# Altium PCB PCB_LiBoBattery.PcbDoc
Units mil, origin at the board's own origin, x right, y up, seen from the top; angles counter-clockwise.
Board outline 1960.63 x 1724.41 mil, 2 copper layers (Top Layer, Bottom Layer); 18 components, 10 nets, 52 pads, 11 vias.
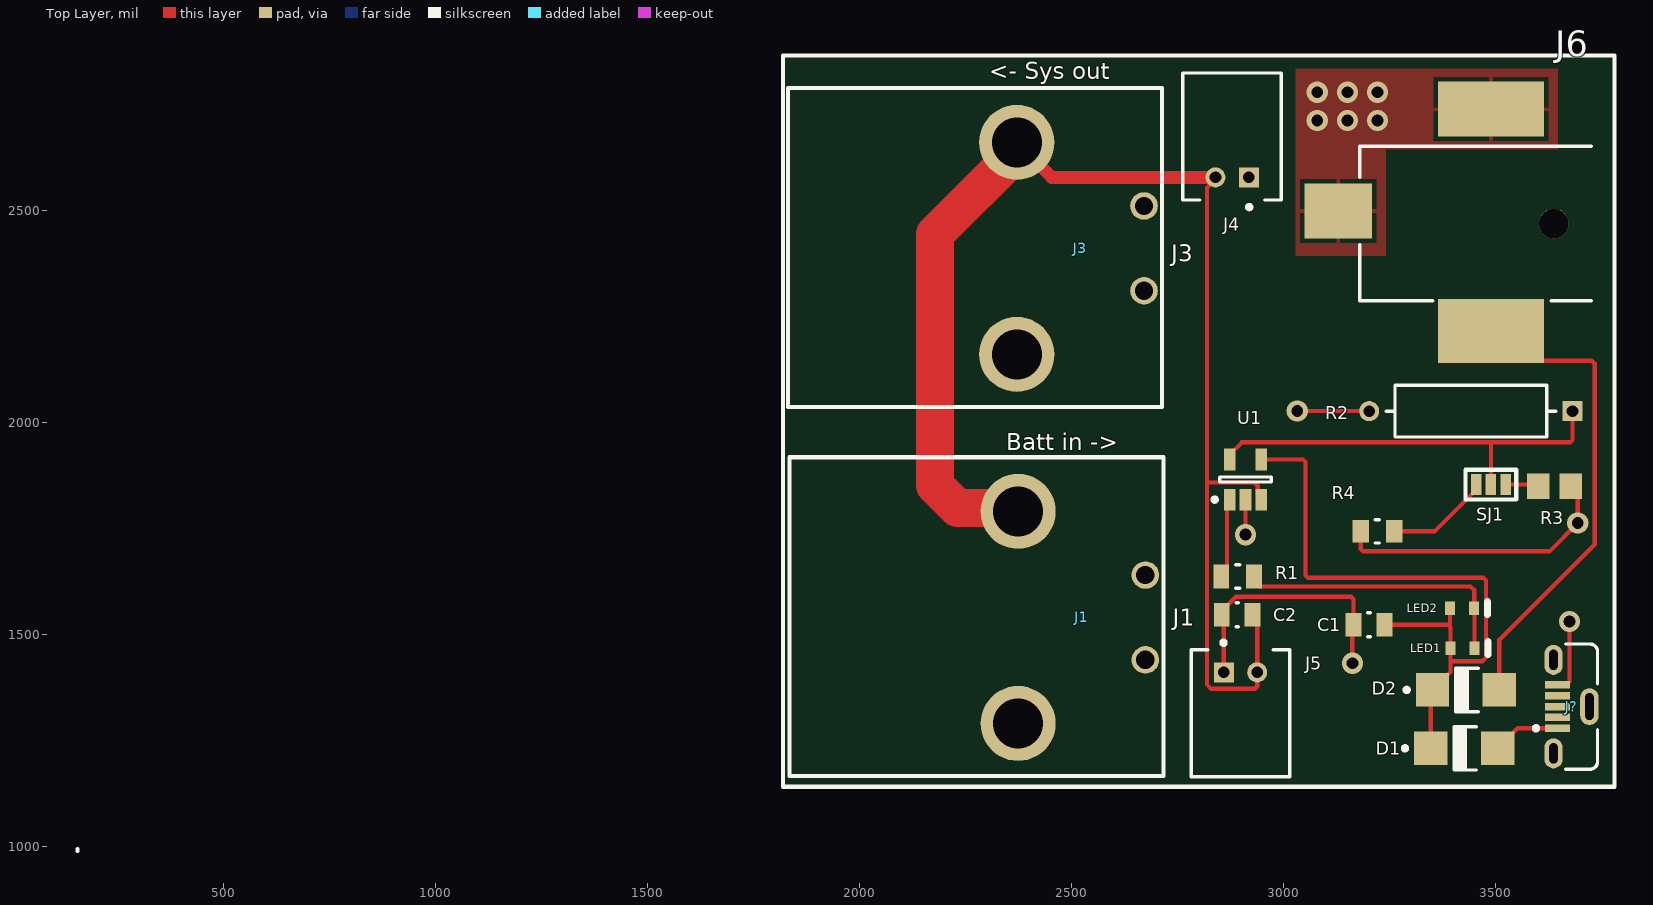
[diagram p0: Top Layer view]
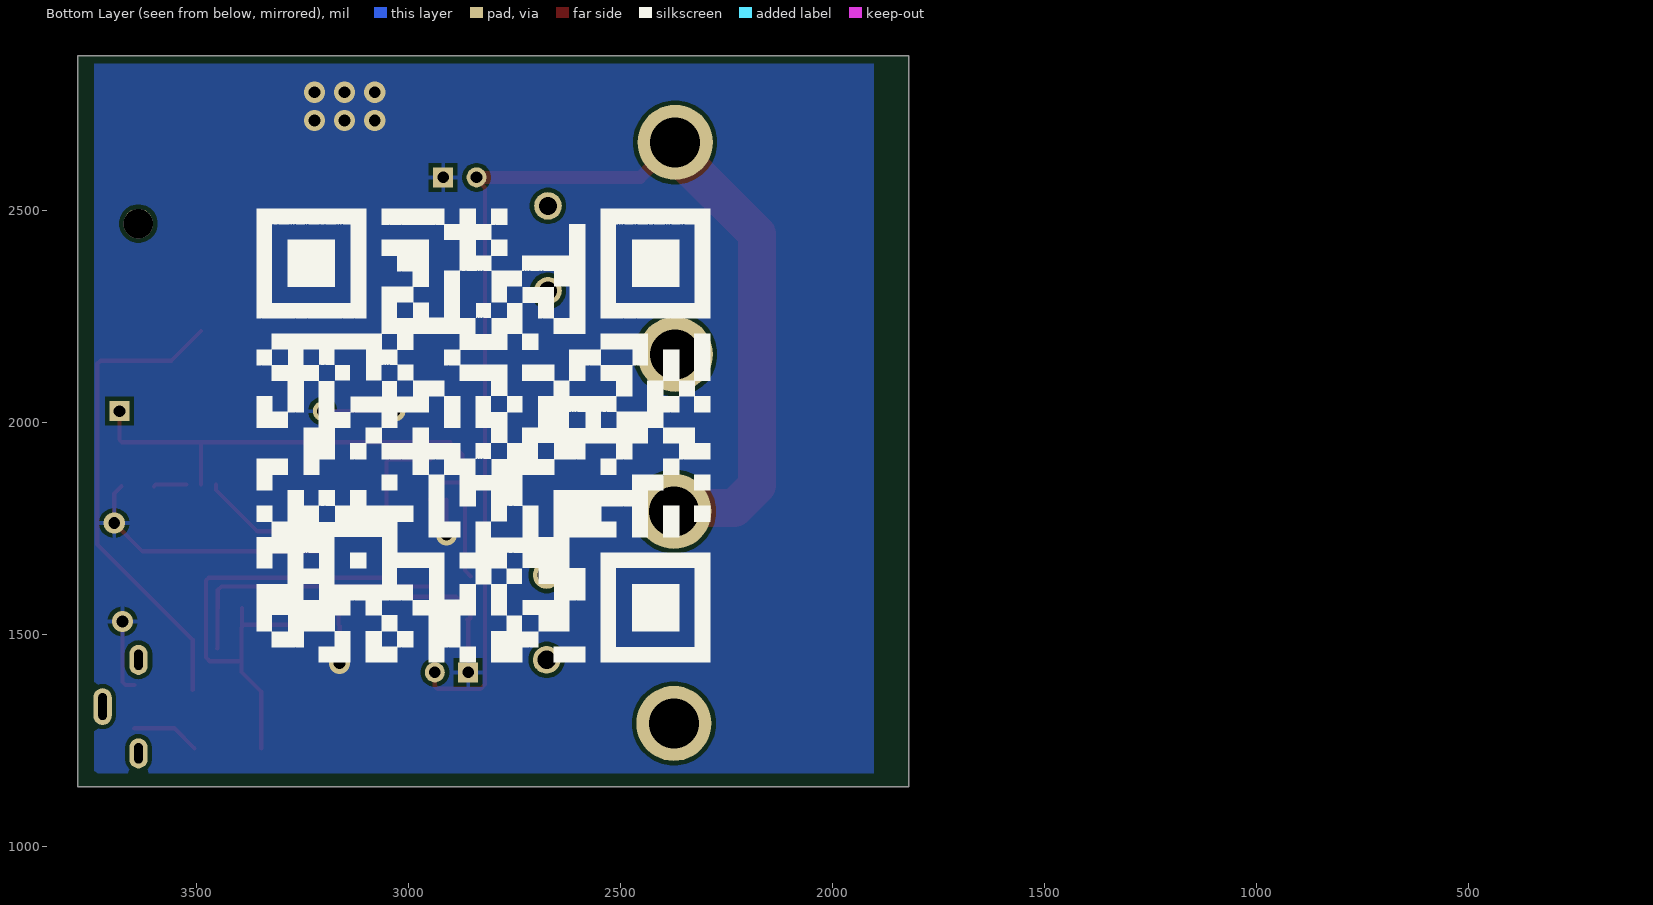
[diagram p1: Bottom Layer view, seen from below]
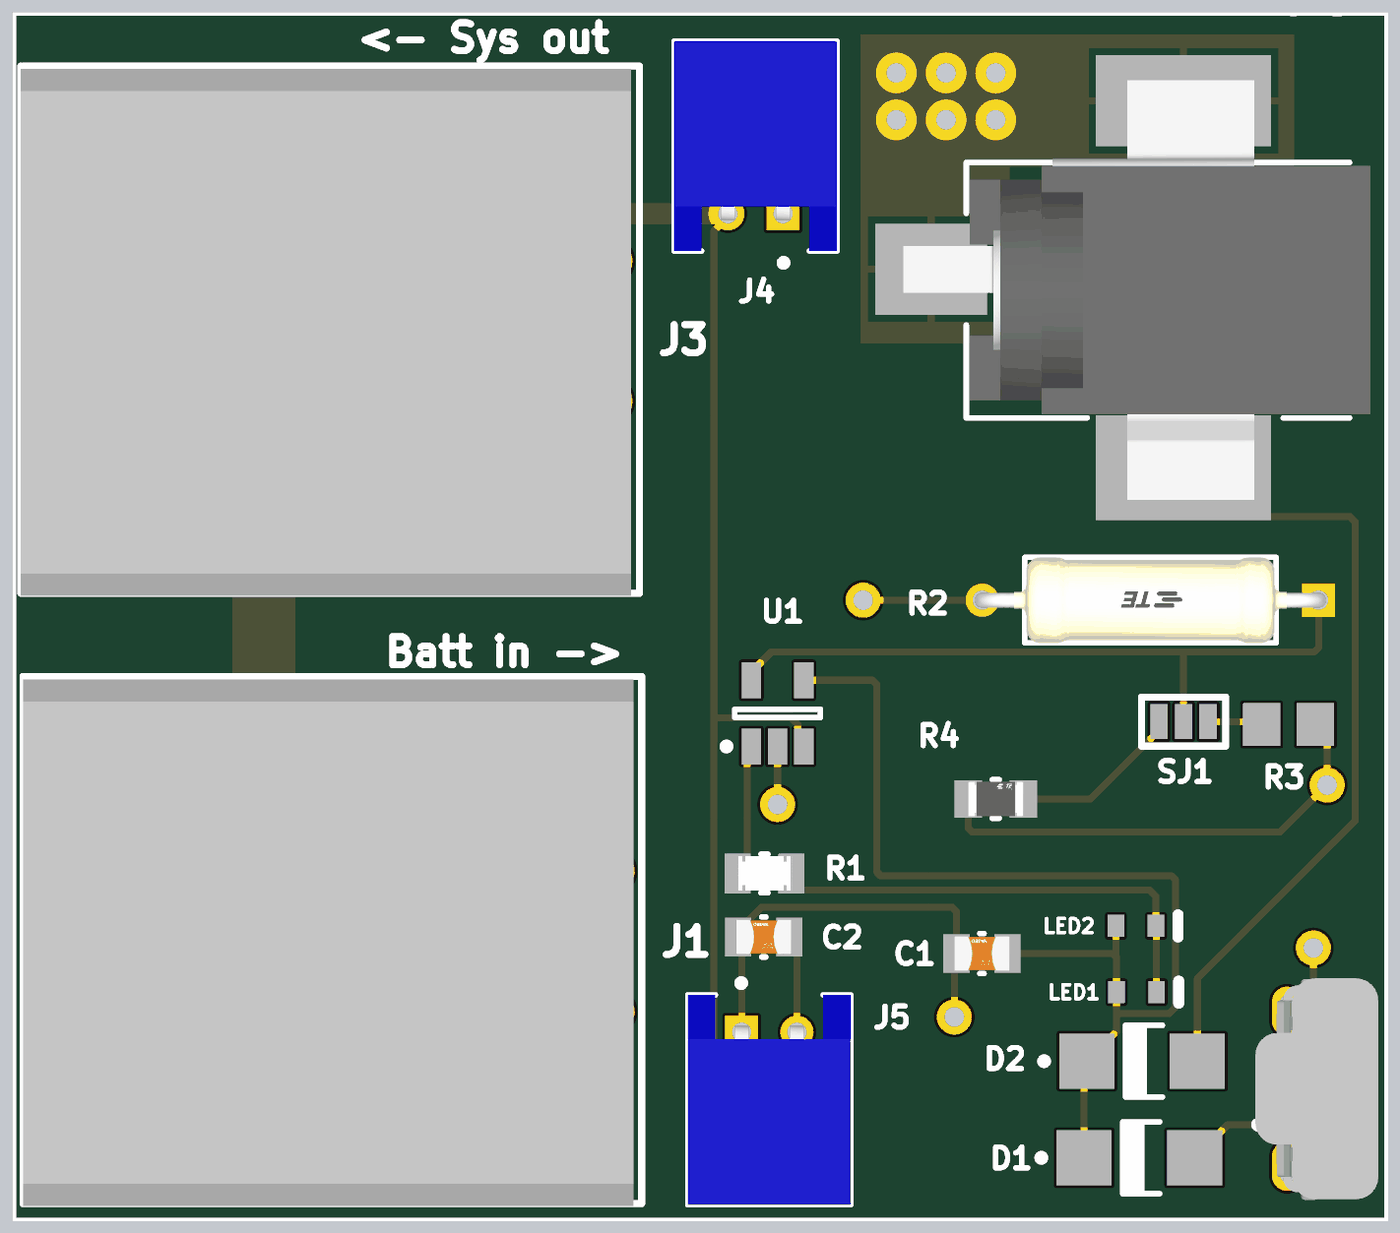
[diagram p2: 3D render of the assembled board from above, using the file's embedded part models]

## Layer stack, top to bottom
Top Solder: solder mask 0.4, Solder Resist, Dk 3.5
Top Layer: signal copper 1.4
Dielectric 1: dielectric 12.6, FR-4, Dk 4.8
Bottom Layer: signal copper 1.4
Bottom Solder: solder mask 0.4, Solder Resist, Dk 3.5

## Board outline
1818.9,1141.73 1818.9,2866.14 3779.53,2866.14 3779.53,1141.73

## Design rules (kind name [scope] priority, off if disabled: settings)
Clearance [All] p1: gap=10 ignorepadtopadclearanceinfootprint=FALSE
PolygonConnect [All] p1: connectstyle=Relief reliefconductorwidth=10 reliefentries=4 polygonreliefangle="90 Angle" airgapwidth=10
RoutingVias [All] p1: holewidth=28 width=50 viastyle="Through Hole" minholewidth=28 minwidth=50 maxholewidth=28 maxwidth=50
SolderMaskExpansion [All] p1: expansion=4 istentingtop=FALSE
SupplyNets "Schematic Supply Nets" [InNet('GND')] p1: voltage=0.000
Width [All] p1: maxlimit=10 minlimit=10 preferedwidth=10
30 further rules are at their usual default settings.

## Components (designator, comment, footprint, x,y, rotation, side; value= is the part's Value field where it differs from the comment)
C1 "4.7UF" FP-CC0805-0_85-MFG 3200.79,1523.62 r180 top value="4.7 uF"
C2 "4.7UF" FP-CC0805-0_85-MFG 2889.76,1547.24 r180 top value="4.7 uF"
D1 "40V, 1A" ONSC-SMA-2-403D-02_V 3425.2,1232.28 r0 top
D2 "40V, 1A" ONSC-SMA-2-403D-02_V 3429.13,1370.08 r0 top
J1 "1-79276-2" PCBComponent_1 2373.23,1790.94 r270 top
J3 "1-79276-2" PCBComponent_1 2370.08,2661.42 r270 top
J4 "S2B-PH-K-S(LF)(SN)" JST-S2B-PH-K-S_V 2877.95,2675.2 r180 top
J5 "S2B-PH-K-S(LF)(SN)" JST-S2B-PH-K-S_V 2897.64,1314.96 r0 top
J6 "CONN PWR JACK 2.1X5.5MM SOLDER" FP-RASM722PTR13X-MFG 3468.9,2469.68 r90 top
J? "105133-0001" MOLX-105133-0001_V 3678.15,1330.71 r90 top
LED1 "RED" VISH-TLMS1000_V 3421.26,1468.5 r0 top
LED2 "RED" VISH-TLMS1000_V 3420.28,1562.99 r0 top
R1 "330" FP-CRCW0805-e3-MFG 2890.75,1637.8 r180 top
R2 "PROG" FP-CFR50J2K2-MFG 3440.94,2027.56 r180 top
R3 "2k" RESC2013X70X40ML20T20 3637.8,1850.39 r180 top
R4 "10k" FP-RN732A-MFG 3220.47,1744.09 r0 top value=10KΩ
SJ1 "SJumper3POS" SJumper3POS-Footprint-1 3488.19,1854.33 r180 top
U1 "Change management controler" SOT-23-OT5_M 2909.45,1866.14 r90 top

## Footprints (in the part's own frame and the unit in brackets; to place one, negate y for a bottom-side part, rotate by r counter-clockwise, add the part's x,y. Pads: shape width x height; smd on the part's side, far side on the other; paste and mask are expansions set on the pad)
FP-CC0805-0_85-MFG [mm]
  rect 0.95x1.4 smd paste+0 mask+0: 1(-0.925,0) 2(0.925,0)
  silkscreen extent -0.08,-0.72 0.08,0.72, body extent -1.6,-1.05 1.6,1.05, height 0.25
FP-CFR50J2K2-MFG [mm]
  rect 1.2x1.2 hole 0.7 paste-2539.97 mask+0: 1(-6.09,0)
  round 1.2 hole 0.7 paste-2539.97 mask+0: 2(6.09,0)
  silkscreen extent -5.09,-1.55 5.09,1.55, body extent -6.79,-1.65 6.79,1.65, height 0.25
FP-CRCW0805-e3-MFG [mm]
  rect 0.95x1.45 smd paste+0 mask+0: 1(-0.975,0) 2(0.975,0)
  silkscreen extent -0.13,-0.7 0.13,0.7, body extent -1.55,-0.82 1.55,0.82, height 0.25
FP-RASM722PTR13X-MFG [mm]
  rect 3.3x4.06 smd paste+0 mask+0: 1(0.76,8.65)
  rect 3.81x6.35 smd paste+0 mask+0: 2(-6.43,-0.49)
  rect 3.3x6.35 smd paste+0 mask+0: 3(6.86,-0.49)
  round 1.78 hole 1.78 unplated paste-2539.97 mask+0: ""(0,-4.25)
  silkscreen extent -4.63,-6.5 4.63,7.38, body extent -8.43,-7.48 8.61,10.78, height 0.25
FP-RN732A-MFG [mm]
  rect 1x1.35 smd paste+0 mask+0: 1(-1,0) 2(1,0)
  silkscreen extent -0.13,-0.7 0.13,0.7, body extent -1.6,-0.8 1.6,0.8, height 0.25
JST-S2B-PH-K-S_V [mm] "THD, 2-Leads, Body 7.6x5.9mm, Pitch 2mm"
  rect 1.2x1.2 hole 0.7: 1(-1,2.45)
  round 1.2 hole 0.7: 2(1,2.45)
  silkscreen extent -2.95,-3.8 2.95,4.35, body extent -2.95,-3.8 2.95,3.8, height 4.8
MOLX-105133-0001_V [mm] "Micro USB B, 5-Leads, Pitch 0.65mm"
  rect 0.45x1.5 smd: 1(-1.3,0.825) 2(-0.65,0.825) 3(0,0.825) 4(0.65,0.825) 5(1.3,0.825)
  oval 1.8x1.1 hole 0.5 slot 1.2 at 0 deg: 6(-2.8,1.075) 7(2.8,1.075)
  oval 2.2x1.1 hole 0.5 slot 1.6 at 0 deg: 8(0,-1.075)
  silkscreen extent -3.75,-1.56 3.75,2.25, body extent -4.02,-2.22 4,2.23, height 7.51
ONSC-SMA-2-403D-02_V [mm] "Molded, 2-Leads, Body 4.57x2.92mm"
  rect 2x2 smd: 1(-2,0) 2(2,0)
  silkscreen extent -3.67,-1.3 0.74,1.3, body extent -2.16,-1.3 2.16,1.3, height 2.2
PCBComponent_1 [mm]
  round 4.5 hole 3: 1(0,0) 2(12.7,0)
  round 1.65 hole 1.1: ""(3.81,7.62) ""(8.89,7.62)
  silkscreen extent -3.25,-13.7 15.85,8.7, body extent -3.14,-13.7 15.94,8.4, height 10.86
RESC2013X70X40ML20T20 [mm] "Chip Resistor, 2-Leads, Body 2.00x1.25mm, IPC Low Density"
  rect 1.35x1.55 smd: 1(-0.975,0) 2(0.975,0)
  body extent -1.1,-0.72 1.1,0.72, height 0.7
SJumper3POS-Footprint-1 [mil]
  rect 25x50 smd: 1(-35,0) 2(0,0) 3(35,0)
  silkscreen extent -60,-35 60,35
SOT-23-OT5_M [mm] "SOT23, 5-Leads, Body 2.9x1.7mm, Pitch 0.95mm, Lead Span 2.8mm, IPC Low Density"
  rect 1.3x0.7 smd: 1(-1.2,0.95) 2(-1.2,0) 3(-1.2,-0.95) 4(1.2,-0.95) 5(1.2,0.95)
  silkscreen extent -1.32,-1.55 0.15,1.97, body extent -0.9,-1.55 0.9,1.55, height 1.45
VISH-TLMS1000_V [mm] "SMD, 2-Leads, Body 0.8x1.6mm"
  rect 0.6x0.8 smd: 1(-0.725,0) 2(0.725,0)
  silkscreen extent 1.52,-0.4 1.52,0.4, body extent -0.8,-0.4 0.8,0.4, height 0.65

## Part data
C1 C2: library part CMP-03422-001342-1, "CAP CER 4.7UF 6.3V X7R 0805", Capacitance="4.7 uF", Manufacturer=Yageo, Manufacturer Part Number=CC0805KKX7R5BB475, Package=CC0805-0.85, Temperature="-30°C to +85°C", Temperature Characteristic=X7R, Temperature Range High=+85°C, Temperature Range Low=-30°C, Tolerance=0.1, Voltage Rating="6.3 V", Automotive=No, Category=Cap, ComponentLink2Description=Datasheet, ComponentLink2URL=http://www.yageo.com/documents/recent/UPY-GPHC_Y5V_6.3V-to-50V_8.pdf, Device Class L1="Passive Components", Device Class L2=Capacitors, Device Class L3="Ceramic Capacitors", Digikey Description="CAP CER 4.7UF 6.3V X7R 0805", Footprint Url=http://www.yageo.com/exep/pages/download/literatures/UPY-C_GEN_24.pdf, Height=0.95mm, Ipc Land Pattern Name=CAPC200125X85, Lead Free=Yes, Material=Ceramic, Mouser Description="Multilayer Ceramic Capacitors MLCC - SMD/SMT 4.7uF 6.3V X7R 10%", Octopart=https://octopart.com/cc0805kkx7r5bb475-yageo-27548069, RoHS=TRUE
D1 D2: library part CMP-1055-00320-1, "Schottky Power Rectifier, 2-Pin SMA, Pb-Free, Tape and Reel", Manufacturer="On Semiconductor", PartNumber=MBRA140T3G, ComponentLink1Description="Manufacturer URL", ComponentLink1URL=http://www.onsemi.com/, ComponentLink2Description=Datasheet, ComponentLink2URL=http://www.onsemi.cn/pub_link/Collateral/MBRA140T3-D.PDF, ComponentLink3Description="Package Specification", ComponentLink3URL=http://www.onsemi.com/pub_link/Collateral/403D-02.PDF, Configuration=Single, DatasheetVersion="Rev. 10", IFSM Max (A)=30, Mounting Technology="Surface Mount", PackageDescription="2-Pin Small Molded Package, J-Bend Lead, Body 2.605 x 4.315 mm", PackageReference=SMA-2-403D-02, PackageVersion="Rev. G, 07/2012", Packing="Tape and Reel", RoHS=TRUE
J1 J3: Manufacture="TE conectivity", Supplier Part Number 1=A29545-ND, Supplier 1=DigiKey
J4 J5: library part CMP-1755-00004-1, "Male Header, Pitch 2 mm, 1 x 2 Position, Height 4.8 mm, Tail Length 3.4 mm, -25 to 85 degC, RoHS, Bulk", Capacitance="10 uF", Case\Package=Radial, Max Operating Temperature="85 degC", Min Operating Temperature="-40 degC", Package Quantity=200, Tolerance=20%, Voltage Rating="50 V", ComponentLink1Description=Datasheet, ComponentLink1URL=http://www.jst-mfg.com/product/pdf/eng/ePH.pdf, DatasheetVersion=Dec-12, Diameter="5 mm", Height="11 mm", Lead Pitch="2 mm", Length="11 mm", Mount="Through Hole", PackageDescription="Male Header, Pitch 2 mm, 1 x 2 Position, Height 4.8 mm, Tail Length 3.4 mm", PackageReference=S2B-PH-K-S, Packaging=Bulk, Pins=2, Radiation Hardening=No, REACH SVHC="No SVHC", RoHSCompliant=true, Voltage Rating (DC)="50 V"
J6: library part CMP-47995-000002-1, Case/Package=SMD/SMT, Color=Black, Current Rating=5A, Package Quantity=120, Connector Type=Jack, Contact Material="Copper Alloy", Contact Plating=Tin, Gender=Male, Housing Color=Black, Housing Material=Thermoplastic, Mount="Surface Mount", Shielding=Unshielded, Termination=Solder
J?: library part CMP-2000-05829-1, "Micro-USB B Receptacle, Vertical, -30 to 85 degC, 5-Pin SMD, RoHS, Tape and Reel", Color=Black, Current Rating=1.8A, Flammability Rating=UL94V-0, Manufacturer=Molex, Package Description="5-Pin Surface Mount Device, Pitch 0.65 mm", Package Version="Rev. C, 11/2015", Voltage - Max=30V, Voltage Rating=30VAC, Brand=Molex, Connector Type=MicroUSBTypeBReceptacle, Contact Material=CopperAlloy, Contact Plating=Gold, Datasheet URL=http://www.molex.com/webdocs/datasheets/pdf/en-us/1051330001_IO_CONNECTORS.pdf, Datasheet Version=03/2016, Factory Pack Quantity=6000, Gender=Receptacle, Manufacturer URL=http://www.molex.com/, Mounting Angle=Vertical, Mounting Style=SMD/SMT, Mounting Technology=SurfaceMount, Number of Ports=1, Package Reference=105133-0001, Package URL=http://www.molex.com/pdm_docs/sd/1051330001_sd.pdf, Packaging=Reel, PartNumber=105133-0001, Product=MicroUSBTypeBConnectors, Product Category=USBConnectors, RoHS=Details, Series=105133, Standard=USB, Termination Style=SolderTail
LED1 LED2: library part CMP-2000-07254-1, "Low Current LED, 40 mW, 1.8 V, -40 to 100 degC, 2-Pin SMD (0603), RoHS, Tape and Reel", Forward Current If=2mA, Forward Voltage=1.8V, LED Colour=Red, Manufacturer=Vishay, Package Description="2-Pin Surface Mount Device, Body 1.6 x 0.8 mm", Package Reference=TLMS1000, Automotive Qualification Standard=AEC-Q100, Bulb Size=1.6mmx0.8mm, Datasheet URL=https://datasheet.ciiva.com/5798/1698881-5798337.pdf, Datasheet Version="Rev. 1.7, 02/2011", LED Mounting=SMD, Lens Shape=Rectangular, Luminous Intensity=4mcd, Manufacturer URL=http://www.vishay.com/, Mounting Technology=SurfaceMount, MSL=MSL2-1year, Packaging=CutTape, Product Range=-, SVHC=ToBeAdvised, Viewing Angle=80°, Wavelength Typ=636nm
R1: library part CMP-2001-03823-2, "RES Thick Film, 330Ω, 1%, 0.125W, 100ppm/°C, 0805", Case Code (Imperial)=0805, Case Code (Metric)=2012, Max Operating Temperature=155°C, Max Power Dissipation=125mW, Min Operating Temperature=-55°C, Package Quantity=10, Resistance=330R, Temperature Coefficient=100ppm/°C, Tolerance=1%, Voltage Rating=150V, Case/Package=0805, Composition="Thick Film", Contact Plating=Tin, Depth=1.25mm, Features="Automotive AEC-Q200", Height=0.02inch, Lead Free="Lead Free", Length=2mm, Military Standard=Not, Mount="Surface Mount", Number of Terminations=2, Packaging="Tape and Reel", Power Rating=125mW, Termination=SMD/SMT, Voltage Rating (DC)=150V, Weight=0.000194oz, Width=0.049inch
R2: library part CMP-03212-000011-1, "RES 2.2K OHM 5% 1/2W AXIAL", Case/Package=Axial, Max Operating Temperature=155°C, Max Power Dissipation=500mW, Min Operating Temperature=-55°C, Number of Resistors=1, Package Quantity=3000, Resistance=2.2kR, Resistance Tolerance=5%, Resistor Type="Thin Film", Temperature Coefficient=0ppm/°C, Voltage Rating=350V, Diameter=3mm, ELV=Compliant, Length=9mm, Mount=Axial, Number of Terminations=2, Packaging="Cut Tape", Power Rating=500mW, Radiation Hardening=No, REACH SVHC="No SVHC", RoHS Compliant=Yes, Series="CFR50, Neohm", Technology="CARBON FILM", Termination=Axial, Tolerance=5%, Voltage Rating (DC)=350V
R3: library part CMP-2001-00370-1, Manufacturer=Panasonic, Part Number=ERJ-6GEYJ202V
R4: library part CMP-03211-001029-1, "SMD Chip Resistor, Thin Film, 10KΩ, 100 V, 0805 [2012 Metric], 100 mW, 0.1%, RN73 Series", Manufacturer="TE Connectivity", Manufacturer Part Number=RN73C2A10KBTG, Package=RN732A, Power Rating=0.1W, Resistance=10KΩ, Temperature="-55°C to 155°C", Temperature Coefficient=10ppm/°C, Temperature Range High=155°C, Temperature Range Low=-55°C, Tolerance=0.1%, Voltage Rating=100V, Automotive=No, Category=Res, ComponentLink2Description=Datasheet, ComponentLink2URL=https://www.te.com/commerce/DocumentDelivery/DDEController?Action=showdoc&DocId=Data+Sheet%7F1773270%7FP%7Fpdf%7FEnglish%7FENG_DS_1773270_P.pdf%7F1676162-2, Composition="Thin Film", Device Class L1="Passive Components", Device Class L2=Resistors, Device Class L3="Chip SMD Resistors", Height=0.65mm, Ipc Land Pattern Name=RESC200125X55, Lead Free=Yes, Octopart=https://octopart.com/rn73c2a10kbtg-te+connectivity-21411919, octopart_url=https://octopart.com/rn73c2a10kbtg-te+connectivity-21411919, Packaging="250 cut tape length", RoHS=TRUE, Series=RN73
SJ1: library part CMP-00000-1, "Sjumper"
U1: library part CMP-0133-00139-1, "Simple, Miniature Single-Cell, Fully Integrated Li-Ion/Li-Polymer Charge Management Controller, 4.2V, 5-Pin SOT-23, Industrial Temperature, Tape and Reel", Code_IPC=SOT23-5, DatasheetVersion="revB, Sep-2007", PackageDescription="5-Lead Plastic Small Outline Transistor (OT) [SOT-23]", PackageReference=SOT-23-OT5, PackageVersion="revBB, Aug-2009"

## Via types
v1: diameter 50, hole 28, Top Layer to Bottom Layer, 11 vias

## Nets (pads, with @x,y where several pads share a name; then routed paths per layer and width w, separated by ;. In a path a pad name is that pad's centre, name@x,y a point inside that pad or via, vN(x,y) a via of type N, cw(c..) or ccw(c..) an arc to the next point about the centre after c; other vN are vias at no path point)
GND: C1.2 C2.2 J4.1 J5.1 J6.1 J6.3 J?.5 R2.2 R3.1 R4.1 U1.2 | length 1741.7
  Top Layer w10: J5.1 C2.2@2858.27,1533.46 ; C2.2@2860.77,1535.97 C2.2@2858.27,1533.46 ; v1(2909.45,1736.22) U1.2 ; v1@3023.62,2031.5 3027.56,2027.56 v1(3031.5,2027.56) R2.2 ; v1(3161.42,1433.07) 3161.42,1520.67 C1.2 3164.37,1583.95 3158.51,1589.8 2887.05,1589.8 2853.35,1556.1 C2.2 2853.35,1538.39 C2.2@2858.27,1533.46 ; R4.1 3181.1,1702.71 3186.96,1696.85 3625.98,1696.85 v1(3692.91,1763.78) 3692.91,1833.66 R3.1 ; J?.5 3666.34,1381.89 3673.23,1388.78 v1(3673.23,1531.5)
  other v1: 3078.74,2712.6 3149.61,2712.6 3220.47,2712.6 3078.74,2779.53 3149.61,2779.53 3220.47,2779.53
NetC1_1: C1.1 D1.1 D2.1 LED1.1 LED2.1 U1.4 | length 1582.2
  Top Layer w10: U1.4 3044.85,1913.39 3050.71,1907.53 3050.71,1640.21 3056.57,1634.35 3470.76,1634.35 3476.61,1628.49 3476.61,1446.54 3467.83,1437.76 3396.89,1437.76 3392.72,1441.93 ; C1.1 3386.7,1523.62 3391.73,1518.59 ; D1.1 3346.46,1366.14 3392.72,1412.4 3392.72,1441.93 ; LED2.1 3391.73,1518.59 ; LED1.1@3392.56,1468.66 3392.56,1517.76 3391.73,1518.59 ; LED1.1 3392.72,1441.93
NetC2_1: C2.1 J1.1 J3.1 J4.2 J5.2 U1.3 | length 3302.4
  Top Layer w10: J4.2 2838.58,2573.95 2818.9,2554.26 2818.9,1859.49 ; C2.1@2912.48,1524.68 2926.18,1538.39 C2.1 2937.01,1536.42 J5.2 2937.01,1378.65 2931.15,1372.8 2828.43,1372.8 2818.66,1382.57 2818.66,1826.09 2818.9,1826.33 2818.9,1859.49 ; U1.3 2938.23,1827.52 2938.23,1850.7 2929.44,1859.49 2818.9,1859.49
  Top Layer w30: J3.1 2452.76,2578.74 J4.2
  Top Layer w90: J3.1 2370.08,2637.83 2177.17,2444.92 2177.17,1851.93 2229.89,1799.21 2364.96,1799.21 J1.1
NetD1_2: D1.2 J?.1 | length 161.3
  Top Layer w10: D1.2 3551.18,1279.53 J?.1
NetD2_2: D2.2 J6.2 | length 1139.1
  Top Layer w10: J6.2 3558.19,2146.54 3725.56,2146.54 3732.91,2139.18 3732.91,1713.23 3507.87,1488.19 D2.2
NetLED1_2: LED1.2 LED2.2 R1.1 | length 676.2
  Top Layer w10: R1.1 2929.13,1627.95 2942.83,1614.25 3440.01,1614.25 3448.82,1605.44 LED2.2 3449.31,1562.5 3449.31,1469 LED1.2
NetR1_2: R1.2 U1.1 | length 189.3
  Top Layer w10: R1.2 2866.06,1651.5 2866.06,1812.91 U1.1
NetR2_1: R2.1 SJ1.2 U1.5 | length 1002.2
  Top Layer w10: U1.5 2872.05,1925.2 2900.83,1953.98 3488.19,1953.98 ; SJ1.2 3488.19,1953.98 ; R2.1 3680.71,1959.83 3674.85,1953.98 3488.19,1953.98
NetR3_2: R3.2 SJ1.1 | length 77.9
  Top Layer w10: SJ1.1 3595.47,1854.33 R3.2
NetR4_2: R4.2 SJ1.3 | length 246.3
  Top Layer w10: R4.2 3355.45,1744.09 3453.19,1841.83 SJ1.3
pads on no net: J1. J1.2 J3. J3.2 J6. J?.2 J?.3 J?.4 J?.6 J?.7 J?.8

## Polygon pours and split planes (outlines as drawn)
GND on Bottom Layer "GND" (solid, pour order 0): 1901.57,2846.34 1901.57,1173.23 3732.28,1173.23 3736.22,1169.29 3740.16,1173.23 3740.16,2846.34
GND on Top Layer "GND_L01_P001" (solid, pour order 1): 3027.56,2393.7 3240.16,2393.7 3240.16,2645.67 3645.67,2645.67 3645.67,2834.65 3027.56,2834.65

## Silkscreen, mask and mechanical layers (free items; w line width, h text height)
Top Overlay:
  lines w10: 155,990 155,995 ; 1818.9,1141.73 3779.53,1141.73 3779.53,2866.14 1818.9,2866.14 1818.9,1141.73
  text "<- Sys out" at 2305.28,2810.73 h40
  text "Batt in ->" at 2344.65,1935.2 h40
Bottom Overlay:
  drawing of 28 lines, arcs and shapes, not listed